# Altium PCB SingleLEDArray.PcbDoc
Units mil, origin at the board's own origin, x right, y up, seen from the top; angles counter-clockwise.
Board outline 5225 x 950 mil, 2 copper layers (Top Layer, Bottom Layer); 8 components, 0 nets, 48 pads, 24 vias.
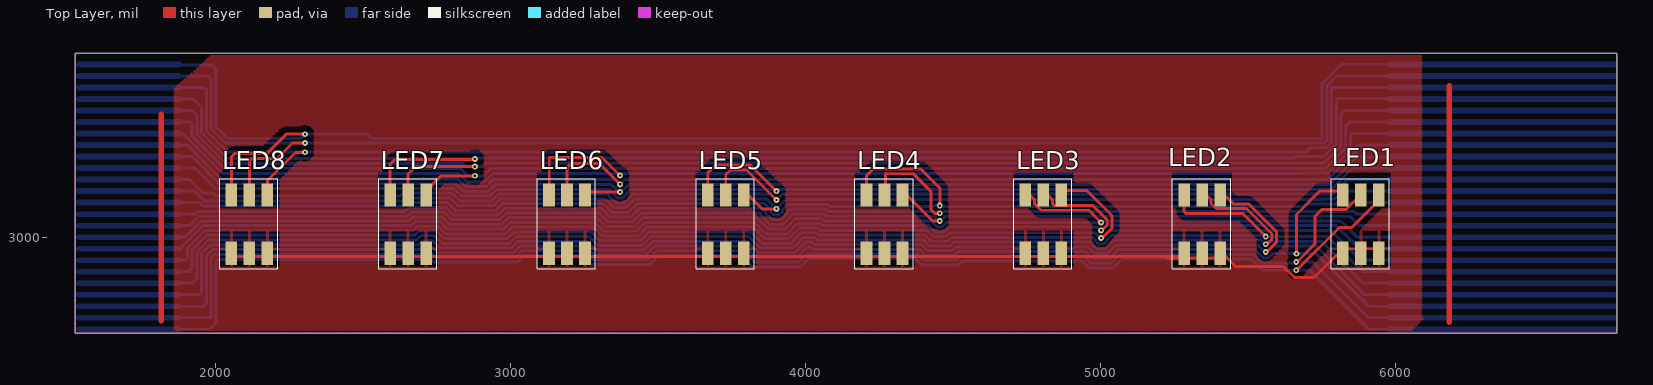
[diagram p0: Top Layer view]
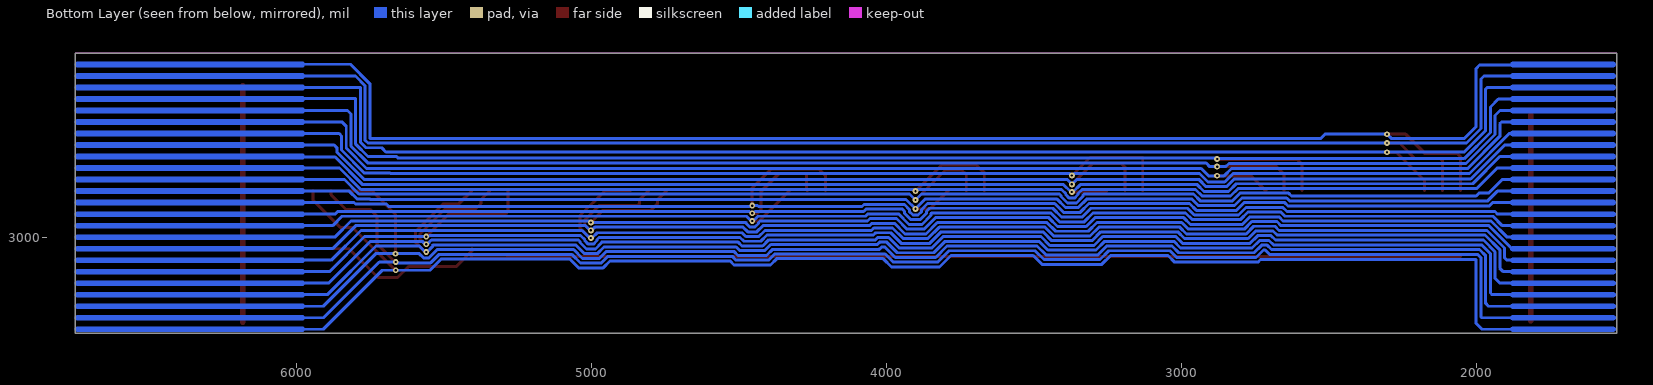
[diagram p1: Bottom Layer view, seen from below]

## Layer stack, top to bottom
Top Layer: signal copper 1.4
Dielectric: dielectric 12.6, FR-4, Dk 4.8
Bottom Layer: signal copper 1.4

## Board outline
6750,2675 6750,3625 1525,3625 1525,2675
cut-out: 1525,2675 1525,3625 6750,3625 6750,2675

## Design rules (kind name [scope] priority, off if disabled: settings)
Clearance [All] p1: gap=6
PolygonConnect [All] p1: connectstyle=Relief reliefconductorwidth=10 reliefentries=4 polygonreliefangle="90 Angle"
RoutingVias [All] p1: holewidth=28 width=50 viastyle="Through Hole" minholewidth=28 minwidth=50 maxholewidth=28 maxwidth=50
SilkscreenOverComponentPads [All] p1: minsilkscreentomaskgap=10
SolderMaskExpansion [All] p1: expansion=4
Width [All] p1: maxlimit=100 minlimit=4 preferedwidth=10 minimp=50.000000 maximp=50.000000 favimp=50.000000
27 further rules are at their usual default settings.

## Components (designator, comment, footprint, x,y, rotation, side; value= is the part's Value field where it differs from the comment)
LED1 "5050RGBLED" "5050 cRGBLED" 5882.32,3045.24 r90 top
LED2 "5050RGBLED" "5050 cRGBLED" 5344.25,3045.24 r90 top
LED3 "5050RGBLED" "5050 cRGBLED" 4806.18,3045.24 r90 top
LED4 "5050RGBLED" "5050 cRGBLED" 4268.11,3045.24 r90 top
LED5 "5050RGBLED" "5050 cRGBLED" 3730.04,3045.24 r90 top
LED6 "5050RGBLED" "5050 cRGBLED" 3191.97,3045.24 r90 top
LED7 "5050RGBLED" "5050 cRGBLED" 2653.9,3045.24 r90 top
LED8 "5050RGBLED" "5050 cRGBLED" 2115.83,3045.24 r90 top

## Footprints (in the part's own frame and the unit in brackets; to place one, negate y for a bottom-side part, rotate by r counter-clockwise, add the part's x,y. Pads: shape width x height; smd on the part's side, far side on the other; paste and mask are expansions set on the pad)
"5050 cRGBLED" [mm] "5050 RGBLED"
  rect 2x1 smd: 1(-2.5,1.55) 2(2.5,1.55) 3(-2.5,0) 4(2.5,0) 5(-2.5,-1.55) 6(2.5,-1.55)
  silkscreen extent -3.85,-2.45 3.9,2.55

## Part data
LED1 LED2 LED3 LED4 LED5 LED6 LED7 LED8: "5050 RGB LED"

## Via types
v1: diameter 19.68, hole 7.87, Top Layer to Bottom Layer, 24 vias

## Nets (pads, with @x,y where several pads share a name; then routed paths per layer and width w, separated by ;. In a path a pad name is that pad's centre, name@x,y a point inside that pad or via, vN(x,y) a via of type N, cw(c..) or ccw(c..) an arc to the next point about the centre after c; other vN are vias at no path point)
pads on no net: LED1.1 LED1.2 LED1.3 LED1.4 LED1.5 LED1.6 LED2.1 LED2.2 LED2.3 LED2.4 LED2.5 LED2.6 LED3.1 LED3.2 LED3.3 LED3.4 LED3.5 LED3.6 LED4.1 LED4.2 LED4.3 LED4.4 LED4.5 LED4.6 LED5.1 LED5.2 LED5.3 LED5.4 LED5.5 LED5.6 LED6.1 LED6.2 LED6.3 LED6.4 LED6.5 LED6.6 LED7.1 LED7.2 LED7.3 LED7.4 LED7.5 LED7.6 LED8.1 LED8.2 LED8.3 LED8.4 LED8.5 LED8.6
copper on no net: | length 150378.7
  Top Layer w10: 2054.8,3158.67 2054.8,3273.8 2065,3284 2175.03,3284 2241.03,3350 v1(2304,3350) ; 2055.8,2934.82 2176.85,2934.82 2653.9,2934.82 3131.94,2934.82 3252.99,2934.82 4207.09,2934.82 4329.13,2934.82 4745.16,2934.82 5222,2934.82 ; 2115.83,3158.67 2116,3158.84 2116,3260 2124,3268 2210,3268 2262,3320 v1(2304,3320) ; 2176.85,3158.67 2176.85,3192.85 2272,3288 2303,3288 v1(2304,3289) ; 2592,3250 2592.87,3249.13 ; 2592.87,3158.67 2592.87,3249.13 ; 2653.9,3158.67 2653.9,3214.9 2679,3240 v1(2880,3240) ; 2714.92,3158.67 2765.25,3209 v1(2880,3209) ; v1(2880,3266) 2878.57,3264.57 2608.31,3264.57 2592.87,3249.13 ; 3130.94,3158.67 3132,3159.73 3132,3271 3311,3271 v1(3372,3210) ; 3191.97,3158.67 3191.97,3237.97 3205,3251 3301,3251 v1(3372,3180) ; 3252.99,3158.67 3257.66,3154 v1(3372,3154) ; 3669.02,3158.67 3669.02,3219.02 3696,3246 3813,3246 v1(3902,3157) ; 3730.04,3158.67 3730.04,3213.04 3746,3229 3800,3229 v1(3902,3127) ; 3791.06,3158.67 3852.73,3097 v1(3902,3097) ; 4207.09,3158.67 4207.09,3209.09 4230,3232 4391,3232 4456,3167 4456,3109 v1(4455,3108) ; 4268.11,3158.67 4272,3162.56 4272,3216 4365,3216 4426,3155 4426,3093 4437,3082 v1(4455,3082) ; 4329.13,3158.67 4431.8,3056 v1(4455,3056) ; 4745.16,3158.67 4775.5,3128.33 4775.5,3114.74 4797.94,3092.3 4960.7,3092.3 v1(5002,3051) ; 4806.18,3158.67 4836.52,3128.33 4836.52,3114.74 4842.96,3108.3 4974.7,3108.3 4974.7,3107.78 5022.84,3059.63 5022.84,3042.37 5004.48,3024 v1(5002,3024) ; 4867.2,3158.67 4954.33,3158.67 5038.84,3074.16 5038.84,3031.37 5005.48,2998 v1(5002,2998) ; 5283.23,3158.67 5283.23,3087.77 5289,3082 5481,3082 v1(5560,3003) ; 5284.23,2934.82 5222,2934.82 ; 5344.25,3158.67 5374.59,3128.33 5374.59,3114.74 5391.33,3098 5494.48,3098 5580.84,3011.63 5580.84,2994.37 5563.48,2977 v1(5560,2977) ; 5405.28,2930.16 5226.66,2930.16 5222,2934.82 ; 5405.28,2961.82 5405.28,2954.72 5458,2902 5619,2902 5657,2864 5723.48,2864 5821.3,2961.82 5882.32,2961.82 5943.35,2961.82 ; 5405.28,3158.67 5449.94,3114 5501.1,3114 5596.84,3018.26 5596.84,2984.37 5563.48,2951 v1(5560,2951) ; 5406.28,2934.82 5407.94,2933.16 ; v1(5663,2889) 5664.48,2889 5809.48,3034 5851,3034 5943.35,3126.35 5943.35,3158.67 ; v1(5663,2917) 5665.48,2917 5727,2978.52 5727,3072 5750,3095 5832.24,3095 5882.32,3145.08 5882.32,3158.67 ; v1(5664,2945) 5664,3078 5744,3158 5820.63,3158 5821.3,3158.67
  Top Layer w19.68: 1817,2718 1817,3417 ; 6181.89,2713.89 6181.89,3513
  Bottom Layer w10: 1825.95,2767 1960,2767 1970,2777 1970,2938.25 1990.75,2959 2695.35,2959 2710.35,2974 2729.06,2974 2754.9,2948.16 3010.2,2948.16 3033.04,2971 3254,2971 3283.84,2941.16 3460.16,2941.16 3490,2971 3794.88,2971 3833.72,2932.16 3970.28,2932.16 4006.12,2968 4016.63,2968 4024.63,2960 4385.76,2960 4406.6,2939.16 4503.4,2939.16 4516.24,2952 4950.64,2952 4973.48,2929.16 5030.52,2929.16 5060.36,2959 5522.52,2959 5551.37,2930.16 5568.63,2930.16 5583.48,2945 v1(5664,2945) 5731,2945 5909,2767 6122.52,2767 ; 1825.95,2806 1948,2806 1954,2812 1954,2944.88 1984.12,2975 2688.73,2975 2703.73,2990 2735.69,2990 2761.53,2964.16 3003.57,2964.16 3026.41,2987 3260.62,2987 3290.47,2957.16 3453.53,2957.16 3483.38,2987 3801.51,2987 3840.35,2948.16 3963.65,2948.16 3999.49,2984 4023.26,2984 4031.26,2976 4392.39,2976 4413.23,2955.16 4496.77,2955.16 4509.61,2968 4957.27,2968 4980.11,2945.16 5023.89,2945.16 5053.73,2975 5535.9,2975 5539.16,2971.74 5539.16,2968.37 5556.52,2951 v1(5560,2951) 5563.48,2951 5583.48,2971 5730,2971 5895,2806 6122.52,2806 ; 1825.95,2845 1921.49,2845 1938,2861.51 1938,2951.51 1977.49,2991 2682.1,2991 2697.1,3006 2742.32,3006 2768.16,2980.16 2996.94,2980.16 3019.78,3003 3267.25,3003 3297.09,2973.16 3446.91,2973.16 3476.75,3003 3808.13,3003 3846.97,2964.16 3957.03,2964.16 3992.87,3000 4029.89,3000 4037.89,2992 4399.01,2992 4419.86,2971.16 4490.14,2971.16 4502.99,2984 4965.16,2984 4965.16,2982.74 4986.74,2961.16 5017.26,2961.16 5038.84,2982.74 5038.84,2986.11 5043.73,2991 5542.52,2991 5556.52,2977 v1(5560,2977) 5563.48,2977 5573.48,2987 5749,2987 5891,2845 6122.52,2845 ; 1825.95,2884 1910,2884 1922,2896 1922,2958.14 1971.86,3008 2676.47,3008 2690.47,3022 2748.94,3022 2774.79,2996.16 2990.31,2996.16 3013.16,3019 3273.88,3019 3303.72,2989.16 3440.28,2989.16 3470.12,3019 3814.76,3019 3853.6,2980.16 3950.4,2980.16 3986.24,3016 4036.51,3016 4044.51,3008 4405.64,3008 4426.48,2987.16 4483.52,2987.16 4496.36,3000 4973.9,3000 4981.16,2992.74 4981.16,2989.37 4993.37,2977.16 5010.63,2977.16 5022.84,2989.37 5022.84,2992.74 5037.1,3007 5549.15,3007 5553.15,3003 v1(5560,3003) 5769,3003 5888,2884 6122.52,2884 ; 1825.95,3001 1896.98,3001 1951.98,3056 2656.59,3056 2670.59,3070 2768.83,3070 2794.67,3044.16 2970.43,3044.16 2993.27,3067 3293.76,3067 3323.6,3037.16 3420.4,3037.16 3450.24,3067 3834.64,3067 3873.48,3028.16 3930.52,3028.16 3966.36,3064 4056.4,3064 4064.4,3056 4428.9,3056 4434.16,3050.74 4434.16,3047.37 4446.37,3035.16 4463.63,3035.16 4475.84,3047.37 4475.84,3050.74 4476.1,3051 v1(5002,3051) 5007,3056 5815,3056 5870,3001 6122.52,3001 ; 1825.95,3040 1913.35,3040 1945.35,3072 2649.96,3072 2663.96,3086 2775.45,3086 2801.3,3060.16 2963.8,3060.16 2986.65,3083 3300.39,3083 3330.23,3053.16 3413.77,3053.16 3443.61,3083 3848.12,3083 3849.16,3081.96 3849.16,3075.11 3880.11,3044.16 3923.89,3044.16 3959.73,3080 4063.02,3080 4071.02,3072 4435.52,3072 4451.52,3056 v1(4455,3056) 4458.48,3056 4474.48,3072 5845,3072 5877,3040 6122.52,3040 ; 1825.95,3079 1929.73,3079 1938.73,3088 2643.33,3088 2657.33,3102 2782.08,3102 2807.92,3076.16 2957.18,3076.16 2980.02,3099 3307.01,3099 3336.86,3069.16 3407.14,3069.16 3436.99,3099 3854.75,3099 3865.16,3088.59 3865.16,3081.74 3886.74,3060.16 3917.26,3060.16 3938.84,3081.74 3938.84,3088.59 3946.25,3096 4069.65,3096 4077.65,3088 4445.52,3088 4451.52,3082 v1(4455,3082) 4458.48,3082 4464.48,3088 5860,3088 5869,3079 6122.52,3079 ; 1825.95,3118 1946.73,3118 1957.73,3107 2639.71,3107 2650.71,3118 2788.71,3118 2814.55,3092.16 2950.55,3092.16 2973.39,3115 3313.64,3115 3343.48,3085.16 3400.52,3085.16 3430.36,3115 3861.37,3115 3881.16,3095.22 3881.16,3088.37 3893.37,3076.16 3910.63,3076.16 3922.84,3088.37 3922.84,3095.22 3939.63,3112 4076.28,3112 4083.28,3105 4434.1,3105 4437.1,3108 v1(4455,3108) 4458,3105 5687,3105 5695,3113 5799.53,3113 5804.53,3118 6122.52,3118 ; 1825.95,3157 1930.35,3157 1964.35,3123 2633.08,3123 2644.08,3134 2795.34,3134 2821.18,3108.16 2943.92,3108.16 2966.76,3131 3320.27,3131 3350.11,3101.16 3393.89,3101.16 3423.73,3131 3868,3131 v1(3902,3097) 3934,3129 5751,3129 5753,3131 5794.9,3131 5820.9,3157 6122.52,3157 ; 1825.95,3196 1913.98,3196 1959.98,3150 1992.16,3150 2002,3140.16 2627.61,3140.16 2637.45,3150 2801.96,3150 2827.81,3124.16 2937.29,3124.16 2960.14,3147 3330.27,3147 3335.16,3142.11 3335.16,3138.74 3356.74,3117.16 3387.26,3117.16 3408.84,3138.74 3408.84,3142.11 3413.73,3147 3882,3147 v1(3902,3127) 3922,3147 5788.27,3147 5837.27,3196 6122.52,3196 ; 1825.95,3235 1931,3235 2000,3166 2808.59,3166 2834.43,3140.16 2930.67,3140.16 2953.51,3163 3336.9,3163 3351.16,3148.74 3351.16,3145.37 3363.37,3133.16 3380.63,3133.16 3392.84,3145.37 3392.84,3148.74 3407.1,3163 3896,3163 v1(3902,3157) 3908,3163 5781.65,3163 5853.65,3235 6122.52,3235 ; 1825.95,3274 1922,3274 2014,3182 2815.22,3182 2841.06,3156.16 2924.04,3156.16 2946.88,3179 3343.52,3179 3368.52,3154 v1(3372,3154) 3375.48,3154 3400.48,3179 5775.02,3179 5868.51,3272.49 6121.01,3272.49 ; 1825.95,3313 1905.63,3313 2020.63,3198 2821.85,3198 2847.69,3172.16 2917.41,3172.16 2942.25,3197 3355,3197 v1(3372,3180) 3389,3197 5770.39,3197 5863,3289.61 5863,3304 5872,3313 6122.52,3313 ; 1825.95,3352 1890,3352 2025,3217 2825.47,3217 2854.32,3188.16 2910.78,3188.16 2939.63,3217 3365,3217 v1(3372,3210) 3379,3217 5681,3217 5682,3218 5768.76,3218 5847,3296.24 5847,3344 5855,3352 6122.52,3352 ; 1825.95,3391 1916,3391 1922,3385 1922,3342.63 2030.63,3234 2831.1,3234 2856.1,3209 v1(2880,3209) 2909,3209 2934,3234 5762.14,3234 5831,3302.86 5831,3377 5846,3392 6121.52,3392 ; 1825.95,3430 1921,3430 1938,3413 1938,3349.25 2036.25,3251 2840.1,3251 2851.1,3240 v1(2880,3240) 2904.89,3240 2916.89,3252 5621,3252 5621.84,3252.84 5758.35,3252.84 5815,3309.49 5815,3418 5827,3430 6122.52,3430 ; 1825.95,3469 1927,3469 1954,3442 1954,3355.88 2042.88,3267 2879,3267 v1(2880,3266) 2882.84,3268.84 5655,3268.84 5660.16,3274 5756.88,3274 5799,3316.12 5799,3471 6120.52,3471 ; 1825.95,3547 1976,3547 1986,3537 1986,3369.14 2035.14,3320 v1(2304,3320) 5757.63,3320 5767,3329.37 5767,3514.37 5799.63,3547 6122.52,3547 ; 1825.95,3584 1991,3584 2002,3573 2002,3375.76 2041.76,3336 2290,3336 v1(2304,3350) 2514,3350 2528,3336 5751,3336 5751,3521 5817,3587 5980,3587 ; 1847.32,2728 1983,2728 1986,2731 1986,2931.63 1997.37,2943 2701.98,2943 2716.98,2958 2722.43,2958 2748.28,2932.16 3016.82,2932.16 3039.67,2955 3247.37,2955 3277.21,2925.16 3466.79,2925.16 3496.63,2955 3788.25,2955 3827.09,2916.16 3976.91,2916.16 4004.75,2944 4379.13,2944 4399.98,2923.16 4510.02,2923.16 4522.87,2936 4944.01,2936 4966.86,2913.16 5037.14,2913.16 5066.99,2943 5515.9,2943 5544.74,2914.16 5660.16,2914.16 v1(5663,2917) 5719,2917 5908,2728 6122.52,2728 ; 1877.32,2689 1982.12,2689 2002,2708.88 2002,2925 2732.81,2925 2741.65,2916.16 3023.45,2916.16 3046.29,2939 3240.74,2939 3270.58,2909.16 3473.42,2909.16 3503.26,2939 3781.62,2939 3820.47,2900.16 3983.53,2900.16 4011.38,2928 4372.51,2928 4393.35,2907.16 4516.65,2907.16 4529.49,2920 4937.39,2920 4960.23,2897.16 5043.77,2897.16 5073.61,2927 5509.27,2927 5547.27,2889 v1(5663,2889) 5709,2889 5909,2689 6122.52,2689 ; 1877.32,2923 1898,2923 1906,2931 1906,2964.76 1965.24,3024 2669.84,3024 2683.84,3038 2755.57,3038 2781.41,3012.16 2983.69,3012.16 3006.53,3035 3280.51,3035 3310.35,3005.16 3433.65,3005.16 3463.49,3035 3821.39,3035 3860.23,2996.16 3943.77,2996.16 3979.61,3032 4043.14,3032 4051.14,3024 4412.27,3024 4433.11,3003.16 4476.89,3003.16 4489.73,3016 4980.52,3016 4998.52,2998 v1(5002,2998) 5005.48,2998 5031.48,3024 5781,3024 5882,2923 6122.52,2923 ; 1877.32,3508 1965,3508 1970,3503 1970,3362.51 2043.51,3289 v1(2304,3289) 2305,3290 5697,3290 5711,3304 5764.25,3304 5783,3322.75 5783,3507.75 5783.25,3508 6122.52,3508 ; 1880.61,2962 1958.61,3040 2663.22,3040 2677.22,3054 2762.2,3054 2788.04,3028.16 2977.06,3028.16 2999.9,3051 3287.13,3051 3316.97,3021.16 3427.03,3021.16 3456.87,3051 3828.01,3051 3866.86,3012.16 3937.14,3012.16 3972.99,3048 4049.77,3048 4057.77,3040 4418.9,3040 4439.74,3019.16 4470.26,3019.16 4486.1,3035 4988.52,3035 4999.52,3024 v1(5002,3024) 5004.48,3024 5020.48,3040 5799,3040 5877,2962 6181.89,2962 ; 5980,3272.49 6122.52,3274 ; 5980,3392 6122.52,3391 ; 5980,3471 6122.52,3469 ; 6179.89,3471 6741.26,3469 ; 6180.38,3272.49 6741.26,3274 ; 6180.89,3392 6741.26,3391
  Bottom Layer w19.68: 1537.95,2689 1877.32,2689 ; 1537.95,2728 1877.32,2728 ; 1537.95,2767 1877.32,2767 ; 1537.95,2806 1877.32,2806 ; 1537.95,2845 1877.32,2845 ; 1537.95,2884 1877.32,2884 ; 1537.95,2923 1877.32,2923 ; 1537.95,2962 1877.32,2962 ; 1537.95,3001 1877.32,3001 ; 1537.95,3040 1877.32,3040 ; 1537.95,3079 1877.32,3079 ; 1537.95,3118 1877.32,3118 ; 1537.95,3157 1877.32,3157 ; 1537.95,3196 1877.32,3196 ; 1537.95,3235 1877.32,3235 ; 1537.95,3274 1877.32,3274 ; 1537.95,3313 1877.32,3313 ; 1537.95,3352 1877.32,3352 ; 1537.95,3391 1877.32,3391 ; 1537.95,3430 1877.32,3430 ; 1537.95,3469 1877.32,3469 ; 1537.95,3508 1877.32,3508 ; 1537.95,3547 1877.32,3547 ; 1537.95,3586 1877.32,3586 ; 5980,2689 6741.26,2689 ; 5980,2728 6741.26,2728 ; 5980,2767 6741.26,2767 ; 5980,2806 6741.26,2806 ; 5980,2845 6741.26,2845 ; 5980,2884 6741.26,2884 ; 5980,2923 6741.26,2923 ; 5980,3001 6741.26,3001 ; 5980,3040 6741.26,3040 ; 5980,3079 6741.26,3079 ; 5980,3157 6181.89,3157 6741.26,3157 ; 5980,3196 6181.89,3196 6741.26,3196 ; 5980,3235 6181.89,3235 6741.26,3235 ; 5980,3274 6181.89,3274 6741.26,3274 ; 5980,3313 6181.89,3313 6741.26,3313 ; 5980,3352 6181.89,3352 6741.26,3352 ; 5980,3391 6181.89,3391 6741.26,3391 ; 5980,3430 6181.89,3430 6741.26,3430 ; 5980,3469 6181.89,3469 6741.26,3469 ; 5980,3508 6181.89,3508 6741.26,3508 ; 5980,3547 6181.89,3547 6741.26,3547 ; 5980,3586 6741.26,3586 ; 6181.89,2962 5980,2962 6741.26,2962 ; 6181.89,3118 5980,3118 6741.26,3118

## Polygon pours and split planes (outlines as drawn)
no net on Top Layer "Top Layer-No Net" (hatched 90Degree grid 10 track 10, remove dead copper, pour order 2): 1860,3500.24 1862.97,3497.57 1862.97,2687 6050.39,2687 6091,2723.44 6086.05,2727.88 6086.05,3614 1986.77,3614 1862.97,3502.9